# Altium PCB PCB1.pcbdoc
Units mil, origin at the board's own origin, x right, y up, seen from the top; angles counter-clockwise.
Board outline 1250 x 1245 mil, 2 copper layers (Top Layer, Bottom Layer); 80 components, 41 nets, 132 pads, 84 vias.
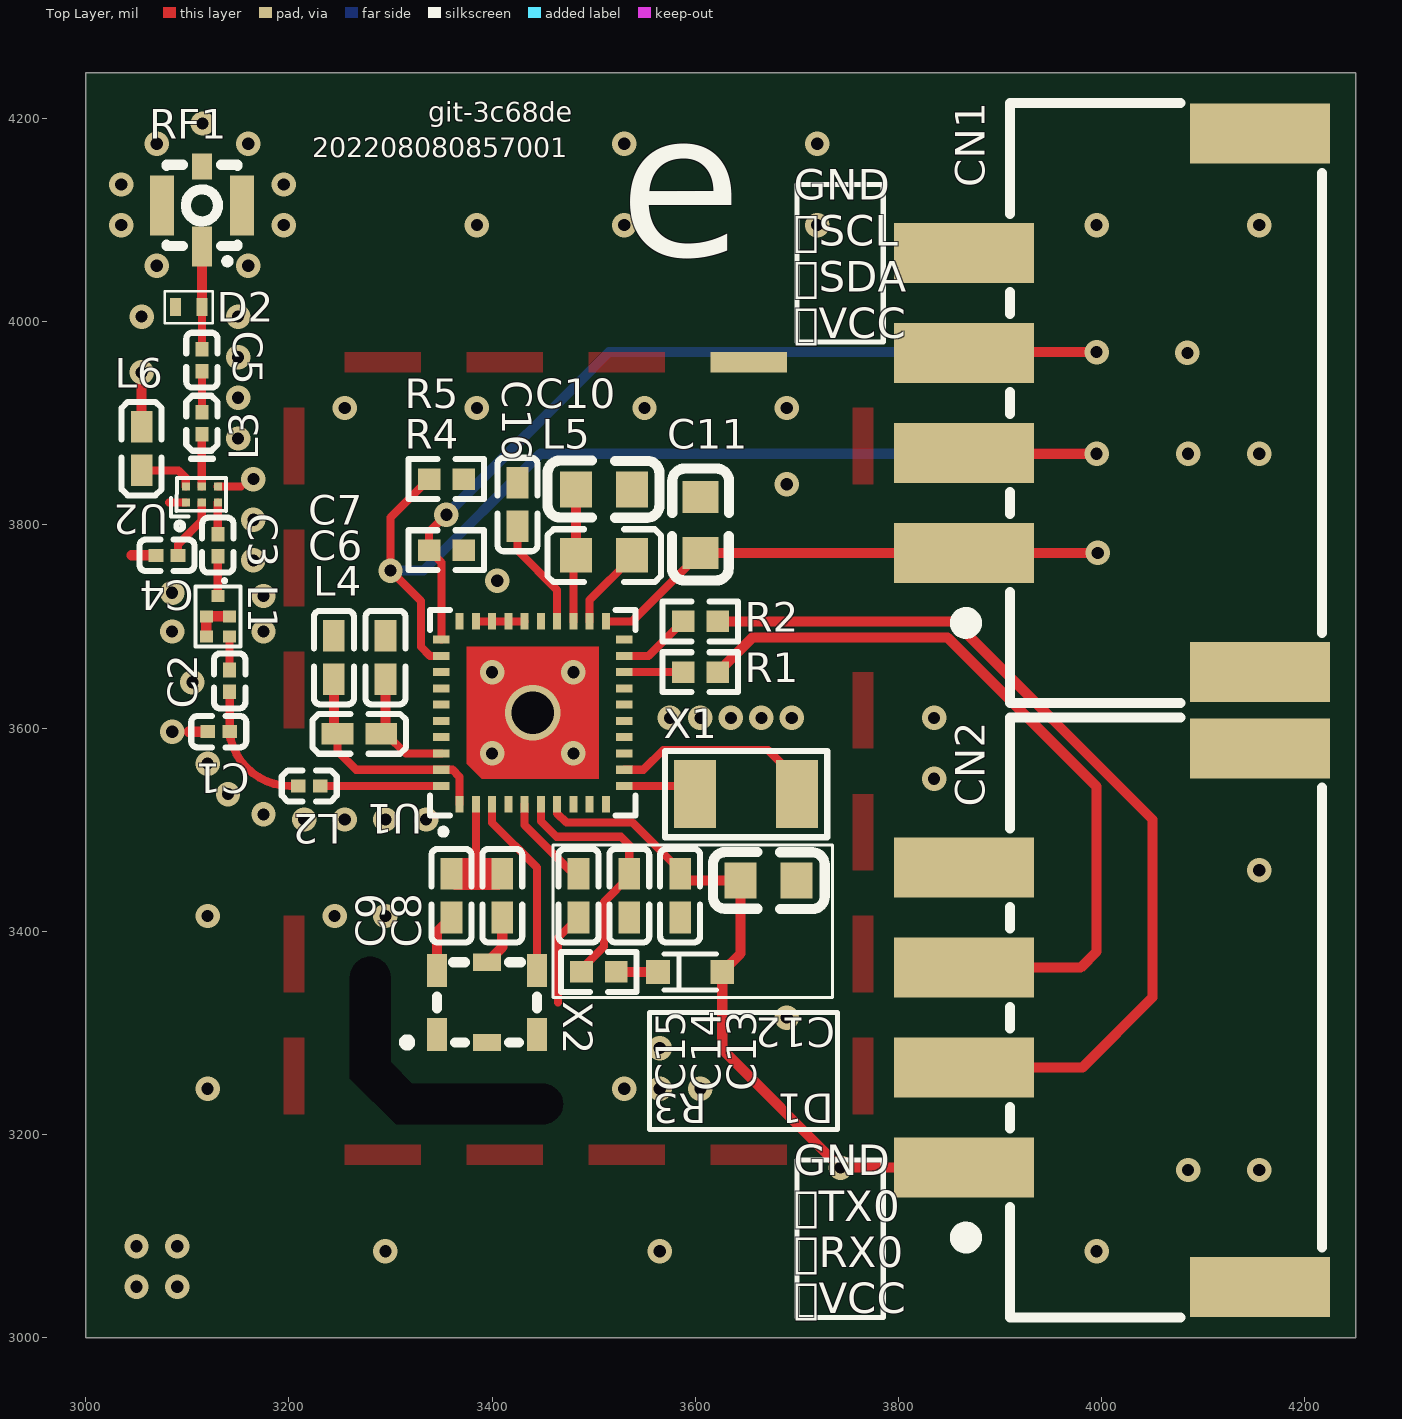
[diagram p0: Top Layer view]
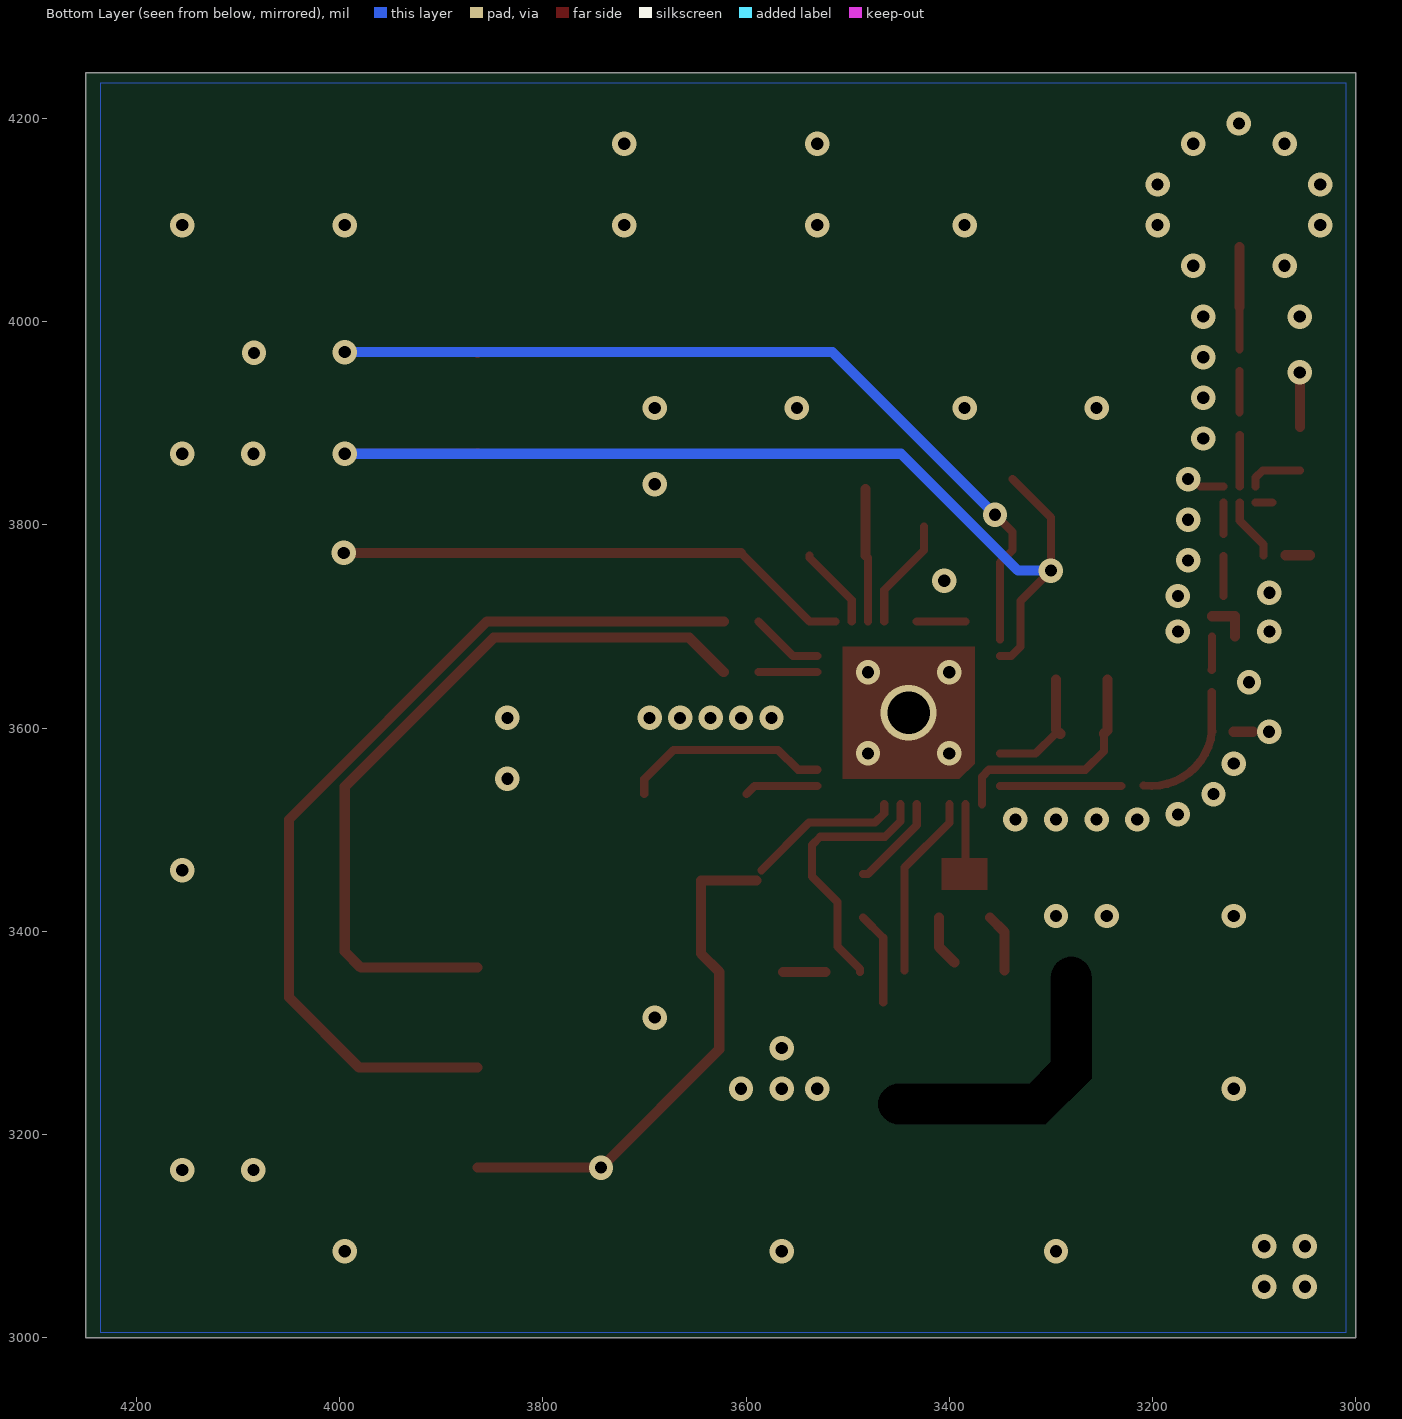
[diagram p1: Bottom Layer view, seen from below]

## Layer stack, top to bottom
Top Solder: solder mask 0.4, Solder Resist, Dk 3.5
Top Layer: signal copper 1.4
Dielectric 1: dielectric 12.6, FR-4, Dk 4.8
Bottom Layer: signal copper 1.4
Bottom Solder: solder mask 0.4, Solder Resist, Dk 3.5

## Board outline
3000,3000 4250,3000 4250,4245 3000,4245
cut-out: 3305,3210 3304.97,3210.03 3260,3255 3260,3355 cw(c3280,3355) 3280,3375 cw(c3280,3355) 3300,3355 3300,3271.57 3321.57,3250 3450,3250 cw(c3450,3230) 3470,3230 cw(c3450,3230) 3450,3210

## Components (designator, comment, footprint, x,y, rotation, side; value= is the part's Value field where it differs from the comment)
C1 "GRM0335C1H2R2CA01D" C0201 3130.92,3596.39 r0 top
C2 "GRM0335C1H470JA01D" C0201 3141.72,3646.39 r270 top
C3 "GRM0335C1H470JA01D" C0201 3130,3780 r90 top
C4 "CL03A104KQ3NNNC" C0201 3080,3770 r0 top
C5 "GRM0335C1H470JA01D" C0201 3114.35,3962.05 r270 top
C6 "CL05A225MQ5NNNC" C0402 3295.06,3669.31 r270 top
C7 "CL05A225MQ5NNNC" C0402 3244.31,3669.31 r270 top
C8 "CL05A225MQ5NNNC" C0402 3410,3435 r90 top
C9 "CL05B102KB5NNNC" C0402 3360,3435 r90 top
C10 "CL10A475KQ8NNNC" C0603 3510,3835 r0 top
C11 "CL10A475KQ8NNNC" C0603 3605,3800 r270 top
C12 "CL10A475KQ8NNNC" C0603 3672,3450 r180 top
C13 "CL05A225MQ5NNNC" C0402 3585,3435 r90 top
C14 "CL05A225MQ5NNNC" C0402 3535,3435 r90 top
C15 "CL05A225MQ5NNNC" C0402 3485,3435 r90 top
C16 "CL05A225MQ5NNNC" C0402 3425,3820 r270 top
CN1 "WAFER-XH2.54-4PWB" CONN-TH_4P-P0.20_XUNPU_WAFER-XH2.54-4PWB 4010,3920 r90 top
CN2 "WAFER-XH2.54-4PWB" CONN-TH_4P-P0.20_XUNPU_WAFER-XH2.54-4PWB 4010,3315 r90 top
D1 "RB751S-40" SOD-523_L1.2-W0.8-LS1.6-FD 3595,3360 r180 top
D2 "ESD105-B1-02EL E6327" TSLP-2-20_L1.0-W0.6-P0.65-BI 3101.3,4014.25 r180 top
L1 "SAFEB1G57KE0F00R15" FILTER-SMD_5P-L1.4-W1.1-L_HDF1588E-B2 3130,3710 r270 top
L2 "LQP03TG10NH02D" L0201 3220,3543 r0 top
L3 "LQP03TN6N8H02D" L0201-RD 3114.35,3900 r90 top
L4 "BLM15AG601SN1D" L0402 3269.31,3594.31 r180 top
L5 "LQM18PN2R2NC0L" L0603 3510,3770 r180 top
L6 "BLM15AG601SN1D" L0402 3055,3875 r270 top
R1 "CR0402J1K00Q10Z" R0402 3605,3655 r0 top
R2 "CR0402J1K00Q10Z" R0402 3605,3705 r0 top
R3 "0402WGJ0561TCE" R0402 3505,3360 r180 top
R4 "CRCW04024K70JNED" R0402 3355,3775 r180 top
R5 "CRCW04024K70JNED" R0402 3355,3845 r180 top
RF1 "KH-IPEX3-2020" IPEX-SMD_4P-L1.7-W1.7-LS2.0-L 3114.4,4113.44 r90 top
U1 "TD1030QFN" TD1030QFN40 3440,3615 r0 top
U2 "BGA 824N6 E6327" TSNP-6_L1.1-W0.7-P0.40-BL 3114.2,3830 r0 top
X1 "NX3215SA-32.768K-STD-MUA-9" OSC-SMD_L3.2-W1.5 3650,3535 r0 top
X2 "TCO22260002805" SMD-2520_6P-L2.5-W2.0 3395,3330 r0 top
? "" ? 0,0 r0 top
? "" ? 0,0 r0 top
? "" ? 0,0 r0 top
? "" ? 0,0 r0 top
? "" ? 0,0 r0 top
? "" ? 0,0 r0 top
? "" ? 0,0 r0 top
? "" ? 0,0 r0 top
? "" ? 0,0 r0 top
? "" ? 0,0 r0 top
? "" ? 0,0 r0 top
? "" ? 0,0 r0 top
? "" ? 0,0 r0 top
? "" ? 0,0 r0 top
? "" ? 0,0 r0 top
? "" ? 0,0 r0 top
? "" ? 0,0 r0 top
? "" ? 0,0 r0 top
? "" ? 0,0 r0 top
? "" ? 0,0 r0 top
? "" ? 0,0 r0 top
? "" ? 0,0 r0 top
? "" ? 0,0 r0 top
? "" ? 0,0 r0 top
? "" ? 0,0 r0 top
? "" ? 0,0 r0 top
? "" ? 0,0 r0 top
? "" ? 0,0 r0 top
? "" ? 0,0 r0 top
? "" ? 0,0 r0 top
? "" ? 0,0 r0 top
? "" ? 0,0 r0 top
? "" ? 0,0 r0 top
? "" ? 0,0 r0 top
? "" ? 0,0 r0 top
? "" ? 0,0 r0 top
? "" ? 0,0 r0 top
? "" ? 0,0 r0 top
? "" ? 0,0 r0 top
? "" ? 0,0 r0 top
? "" ? 0,0 r0 top
? "" ? 0,0 r0 top
? "" ? 0,0 r0 top
? "" ? 0,0 r0 top

## Footprints (in the part's own frame and the unit in brackets; to place one, negate y for a bottom-side part, rotate by r counter-clockwise, add the part's x,y. Pads: shape width x height; smd on the part's side, far side on the other; paste and mask are expansions set on the pad)
C0201 [mil]
  rect 14.51x12.76 smd: 1(-10.8,0) 2(10.8,0)
  silkscreen extent -27,-15 27,15
C0402 [mm]
  rect 0.79x0.54 smd: 1(-0.545,0) 2(0.545,0)
  silkscreen extent -1.17,-0.5 1.17,0.5
C0603 [mm]
  rect 0.8x0.9 smd: 1(-0.7,0) 2(0.7,0)
  silkscreen extent -1.41,-0.71 1.39,0.72
CONN-TH_4P-P0.20_XUNPU_WAFER-XH2.54-4PWB [mm]
  rect 1.5x3.5 smd: 1(-3.75,3.7) 2(-1.25,3.7) 3(1.25,3.7) 4(3.75,3.7) 5(-6.73,-3.7) 6(6.73,-3.7)
  silkscreen extent -7.5,-5.25 7.5,3.85
FILTER-SMD_5P-L1.4-W1.1-L_HDF1588E-B2 [mm]
  rect 0.3x0.325 smd: 1(-0.506,0) 2(0.001,-0.288) 3(0.506,-0.288) 4(0.506,0.288) 5(0.001,0.288)
  silkscreen extent -0.93,-0.56 0.75,0.57
IPEX-SMD_4P-L1.7-W1.7-LS2.0-L [mm]
  rect 1x0.5 smd: 1(-1,0)
  rect 1.5x0.6 smd: 2(0.025,-1) 4(0.025,1)
  rect 0.65x0.5 smd: 3(1,0)
  silkscreen extent -1.45,-0.89 1.04,0.89
L0201 [mil]
  rect 14.51x12.76 smd: 1(-10.8,0) 2(10.8,0)
  silkscreen extent -27,-15 27,15
L0201-RD [mil]
  rect 14.51x12.76 smd: 1(-10.8,0) 2(10.8,0)
  silkscreen extent -35,-15 27,15
L0402 [mm]
  rect 0.79x0.54 smd: 1(-0.545,0) 2(0.545,0)
  silkscreen extent -1.17,-0.5 1.17,0.5
L0603 [mm]
  rect 0.8x0.864 smd: 1(-0.7,0) 2(0.7,0)
  silkscreen extent -1.42,-0.65 1.41,0.67
OSC-SMD_L3.2-W1.5 [mil]
  rect 41.3x66.9 smd: 1(-50.2,0) 2(50.2,0)
  silkscreen extent -80,-42 80,42
R0402 [mm]
  rect 0.566x0.54 smd: 1(-0.433,0) 2(0.433,0)
  silkscreen extent -0.94,-0.5 0.94,0.5
SMD-2520_6P-L2.5-W2.0 [mil]
  rect 19.7x32.5 smd: 1(-49.2,-31.5) 3(49.2,-31.5) 4(49.2,31.5) 6(-49.2,31.5)
  rect 27.6x16.9 smd: 2(0,-39.4) 5(0,39.4)
  silkscreen extent -82,-42 49,39
SOD-523_L1.2-W0.8-LS1.6-FD [mil]
  rect 23.6x23.6 smd: 1(-31.5,0) 2(31.5,0)
  silkscreen extent -26,-18 26,18
TD1030QFN40 [mil]
  rect 8x16 smd: 1(-72,-90) 2(-56,-90) 3(-40,-90) 4(-24,-90) 5(-8,-90) 6(8,-90) 7(24,-90) 8(40,-90) 9(56,-90) 10(72,-90) 21(72,90) 22(56,90) 23(40,90) 24(24,90) 25(8,90) 26(-8,90) 27(-24,90) 28(-40,90) 29(-56,90) 30(-72,90)
  rect 16x8 smd: 11(90,-72) 12(90,-56) 13(90,-40) 14(90,-24) 15(90,-8) 16(90,8) 17(90,24) 18(90,40) 19(90,56) 20(90,72) 31(-90,72) 32(-90,56) 33(-90,40) 34(-90,24) 35(-90,8) 36(-90,-8) 37(-90,-24) 38(-90,-40) 39(-90,-56) 40(-90,-72)
  Top Layer region: -65,65 65,65 65,-65 -50,-65 -65,-50
  silkscreen extent -101,-120 101,101
TSLP-2-20_L1.0-W0.6-P0.65-BI [mil]
  rect 11x17.7 smd: 1(-13,0) 2(13,0)
  silkscreen extent -24,-16 23,16
TSNP-6_L1.1-W0.7-P0.40-BL [mil]
  rect 7.9x7.9 smd: 1(-15.7,-7.9) 2(0,-7.9) 3(15.8,-7.9) 4(15.8,7.9) 5(0,7.9) 6(-15.7,7.9)
  silkscreen extent -30,-34 24,16
? [mil]

## Free pads (board coordinates)
  rect 75x20 smd: 1(3652.5,3960)

## Via types
v1: diameter 24.02, hole 12.01, Top Layer to Bottom Layer, 79 vias
v2: diameter 24, hole 12, Top Layer to Bottom Layer, 4 vias
v3: diameter 55, hole 42, Top Layer to Bottom Layer, 1 vias

## Nets (pads, with @x,y where several pads share a name; then routed paths per layer and width w, separated by ;. In a path a pad name is that pad's centre, name@x,y a point inside that pad or via, vN(x,y) a via of type N, cw(c..) or ccw(c..) an arc to the next point about the centre after c; other vN are vias at no path point)
232_RX0: 
232_TX0: 
$1N3753: L2.1 | length 134.8
  Top Layer w8: 3141.26,3596.69 ccw(c3201.69,3603.74) L2.1@3208.74,3543.31 ; 3141.72,3596.39 3141.72,3635.59
$1N3829: C2.1 L1.4 | length 33
  Top Layer w8: L1.4 3141.34,3657.57 C2.1
$1N4304: U2.2 | length 61.8
  Top Layer w8: 3090.8,3770 3090.8,3780.8 3114.2,3804.2 U2.2
$1N5920: U2.5 | length 50.7
  Top Layer w8: U2.5 3114.2,3888.6
$1N6055: L3.2 | length 40.4
  Top Layer w8: L3.2 3114.35,3951.25
$1N6532: U2.3 | length 31.1
  Top Layer w8: 3130,3790.8 U2.3@3130,3821.9
$1N6544: C3.1 | length 39.3
  Top Layer w8: 3130,3729.92 C3.1
$1N6600: C5.1 D2.1 | length 100.6
  Top Layer w8: C5.1 D2.1@3114.35,4014.2
  Top Layer w10: D2.1 3114.3,4073.47
$1N9128: C9.1 X2.6 | length 57.9
  Top Layer w10: X2.6 3345.8,3399.34 C9.1
$1N17423: R3.1 | length 41.5
  Top Layer w10: R3.1 3563.5,3360
$2N670: 
$2N675: 
$2N680: 
$2N685: 
$2N845: 
$2N849: 
GND: C1.1 C4.1 C6.1 C7.1 C8.1 C11.1 C12.1 C13.1 C14.1 C15.1 C16.1 CN1.4 CN1.5 CN1.6 CN2.4 CN2.5 CN2.6 L1.2 L1.3 L1.5 pad.1 R4.1 R5.1 RF1.2 RF1.3 RF1.4 U1.26 U1.27 U1.28 U1.29 U2.1 U2.4 X2.2 X2.3 X2.5 | length 315
  Top Layer w8: 3082.1,3822.1 U2.1 ; U2.4 3152.9,3837.9 ; U1.29 U1.28 U1.27 U1.26 ; 3465,3330 3465,3393.54 C15.1
  Top Layer w10: 3045,3770 C4.1 ; 3101.39,3596.39 C1.1 ; L1.3 L1.2 L1.5 ; X2.5 3410,3384.4 C8.1
  other v1: 3050,3050 3090,3050 3295,3085 3565,3085 3995,3085 3050,3090 3090,3090 4085,3165 4155,3165 3120,3245 3530,3245 3565,3245 3605,3245 3565,3285 3690,3315 3120,3415 3245,3415 3295,3415 4155,3460 3215,3510 3255,3510 3295,3510 3335,3510 3175,3515 3140,3535 3835,3550 3120,3565 3085.24,3596.39 3575,3610 3605,3610 3635,3610 3665,3610 3695,3610 3835,3610 3105,3645 3085,3695 3175,3695 3175,3730 3085,3733.18 3405,3745 3165,3765 3165,3805 3690,3840 3165,3845 4085,3870 4155,3870 3150,3885 3255,3915 3385,3915 3550,3915 3690,3915 3150,3925 3150,3965 4084.35,3969.21 3055,4005 3150,4005 3070,4055 3160,4055 3035,4095 3195,4095 3385,4095 3530,4095 3720,4095 3995,4095 4155,4095 3035,4135 3195,4135 3070,4175 3160,4175 3530,4175 3720,4175 3115,4195
GPIO_RX0: R2.1 U1.19 | length 72
  Top Layer w8: U1.19 3553.96,3671 R2.1
GPIO_TX0: R1.1 U1.18 | length 58
  Top Layer w8: U1.18 R1.1
LDO_B_O: U1.5 | length 93.4
  Top Layer w8: U1.5 3432,3504.41 3479.95,3456.46 3485,3456.46
LDO_C_O: U1.24 | length 109.7
  Top Layer w8: 3425,3798.54 3425,3775 3464,3736 U1.24
LNA_I: U1.40 | length 119.2
  Top Layer w8: 3230.8,3543 U1.40
P_1_39: U1.39 | length 229.7
  Top Layer w8: 3247.85,3594.31 3247.85,3577.15 3266,3559 U1.39 3361,3559 3368,3552 3368,3525
  Top Layer w10: 3244.31,3647.85 3244.31,3597.85 3247.85,3594.31
P_2&LDO_X_OUT: U1.2 | length 69
  Top Layer w8: 3384,3456 U1.2
P_22: U1.22 | length 82.2
  Top Layer w8: U1.22 3496,3726 3537.55,3767.55 3537.55,3770
P_23: C10.1 L5.2 U1.23 | length 131
  Top Layer w8: U1.23 3480,3767.55 L5.2
  Top Layer w10: L5.2 C10.1
P_38: L4.1 U1.38 | length 122.5
  Top Layer w8: L4.1 3295.69,3594.31 3315,3575 U1.38
  Top Layer w10: L4.1 3295.06,3598.6 3295.06,3647.85
RTC_I: U1.12 X1.2 | length 204.9
  Top Layer w8: U1.12 3549,3559 3568.45,3578.45 3671.55,3578.45 3700.2,3549.8 X1.2
RTC_O: U1.11 | length 73.1
  Top Layer w8: U1.11 3591.8,3543 3599.8,3535
S_RX0: CN2.2 | length 898.1
  Top Layer w10: 3622.04,3705 3855,3705 4050,3510 4050,3335 3980.79,3265.79 CN2.2
S_TX0: CN2.3 | length 747.4
  Top Layer w10: 3622.04,3655 3656.04,3689 3848.37,3689 3995,3542.37 3995,3380 3979.21,3364.21 CN2.3
SCL: CN1.3 U1.31 | length 972.3
  Top Layer w8: U1.31 3350,3762.96 3337.96,3775 3337.96,3792.96 v1(3355,3810)
  Top Layer w10: CN1.3 3865.12,3970 v1(3995,3970)
  Bottom Layer w10: v1(3355,3810) 3515,3970 v1(3995,3970)
SDA: CN1.2 U1.32 | length 1090.5
  Top Layer w8: 3337.96,3845 3300,3807.04 v1(3300,3755) 3330,3725 3330,3680 3339,3671 U1.32
  Top Layer w10: CN1.2 3865.12,3870 v1(3995,3870)
  Bottom Layer w10: v1(3300,3755) 3332.54,3755 3447.54,3870 v1(3995,3870)
V_BCKP: U1.6 | length 257.9
  Top Layer w8: U1.6 3448,3508.21 3463.21,3493 3527,3493 3535,3485 3535,3456.46 3535,3453.87 3510,3428.87 3510,3385 3487.96,3362.96 3487.96,3360
VCC: D1.1 L6.1 U1.7 U1.21 | length 1232.9
  Top Layer w8: U1.7 3464,3516.03 3473.03,3507 3538,3507 3585,3460 ; U1.21 3537.56,3705 3605,3772.44
  Top Layer w10: L6.1 v1(3055,3950) ; 3590,3450 3644.44,3450 3644.44,3377.94 D1.1 3626.5,3283.72 v1(3742.86,3167.36) 3864.33,3167.36 ; 3605,3772.44 3864.25,3772.44 3864.33,3772.36 v1(3996.06,3772.36)
VCC_RF_3V3:  | length 55
  Top Layer w8: 3055,3853.54 3091.46,3853.54 3098.5,3846.5 3098.5,3837.9
VCC_SOURCE: 
XTAL_I: U1.3 X2.4 | length 181.8
  Top Layer w8: U1.3 3400,3506.79 3444.2,3462.59 X2.4
"": 
pads on no net: C1.2 C2.2 C3.2 C4.2 C5.2 C6.2 C7.2 C8.2 C9.2 C10.2 C11.2 C12.2 C13.2 C14.2 C15.2 C16.2 CN1.1 CN2.1 D1.2 D2.2 L1.1 L2.2 L3.1 L4.2 L5.1 L6.2 R1.2 R2.2 R3.2 R4.2 R5.2 RF1.1 U1.1 U1.4 U1.8 U1.9 U1.10 U1.13 U1.14 U1.15 U1.16 U1.17 U1.20 U1.25 U1.30 U1.33 U1.34 U1.35 U1.36 U1.37 U2.6 X1.1 X2.1
copper on no net:
  other v2: 3400,3575 3480,3575 3400,3655 3480,3655
  other v3: 3440,3615

## Polygon pours and split planes (outlines as drawn)
GND on Bottom Layer (solid, remove dead copper): 3010,3005 4235,3005 4235,4235 3010,4235
GND on Top Layer (solid, remove dead copper, pour order 1): 3015,3005 4240,3005 4240,4230 3015,4230
GND on Internal Plane 1 (split plane): 4239.9,4234.9 4239.9,3010.1 3010.1,3010.1 3010.1,4234.9
VCC on Internal Plane 2 (split plane): 4239.9,4234.9 4239.9,3010.1 3010.1,3010.1 3010.1,4234.9

## Other copper
Top Layer:
  region net P_2&LDO_X_OUT: 3362.47,3440.91 3407.47,3440.91 3407.47,3472.01 3362.47,3472.01

## Silkscreen, mask and mechanical layers (free items; w line width, h text height)
Top Overlay:
  lines w3: 3460,3335 3735,3335 3735,3485 3460,3485 3460,3335
  lines w5: 3555,3205 3740,3205 3740,3320 3555,3320 3555,3205 ; 3700,3020 3785,3020 3785,3175 3700,3175 3700,3020 ; 3700,3980 3785,3980 3785,4135 3700,4135 3700,3980
  text "git-3c68de" at 3337.35,4196.66 h19.47
  text "202208080857001" at 3223.08,4161.66 h19.47
  text "e" at 3525,4065 h150
  text "GND /  SCL /  SDA /  VCC" at 3697.08,3983.88 h30.23
  text "GND /  TX0 /  RX0 /  VCC" at 3697.08,3023.88 h30.23
Mechanical 1:
  lines w1: 3260,3255 3304.97,3210.03 3305,3210 3450,3210 ccw(c3450,3230) 3470,3230 ccw(c3450,3230) 3450,3250 3321.57,3250 3300,3271.57 3300,3355 ccw(c3280,3355) 3280,3375 ccw(c3280,3355) 3260,3355 3260,3255
  lines w10: 3000,3000 4250,3000 4250,4245 3000,4245 3000,3000